# Altium PCB AD8349.PcbDoc
Units mm, origin at the board's own origin, x right, y up, seen from the top; angles counter-clockwise.
Board outline 95 x 40 mm, 2 copper layers (Top Layer, Bottom Layer); 53 components, 28 nets, 155 pads, 293 vias.
Unrouted connection lines stored in the file: 5.
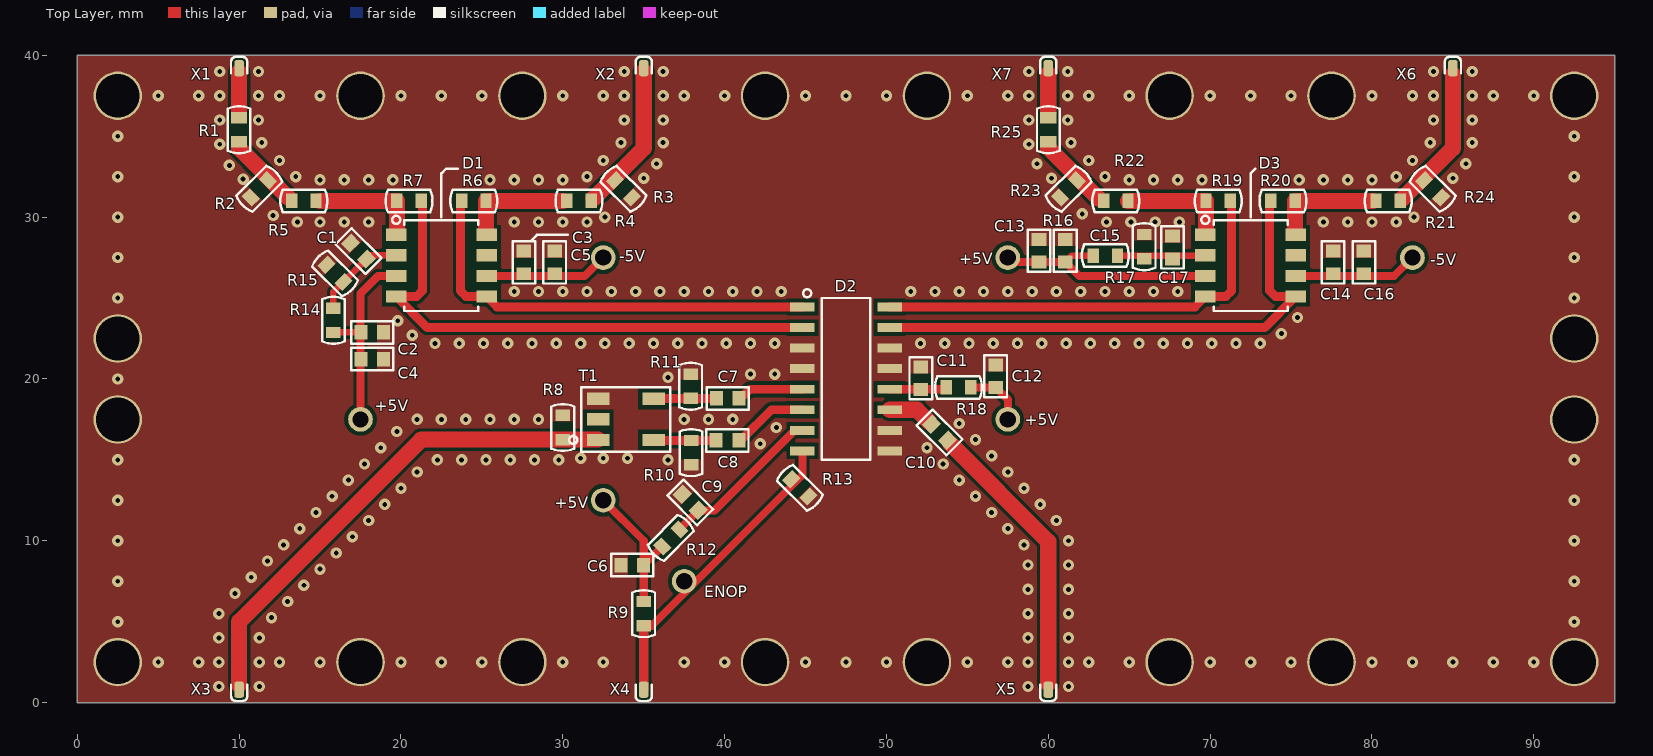
[diagram p0: Top Layer view]
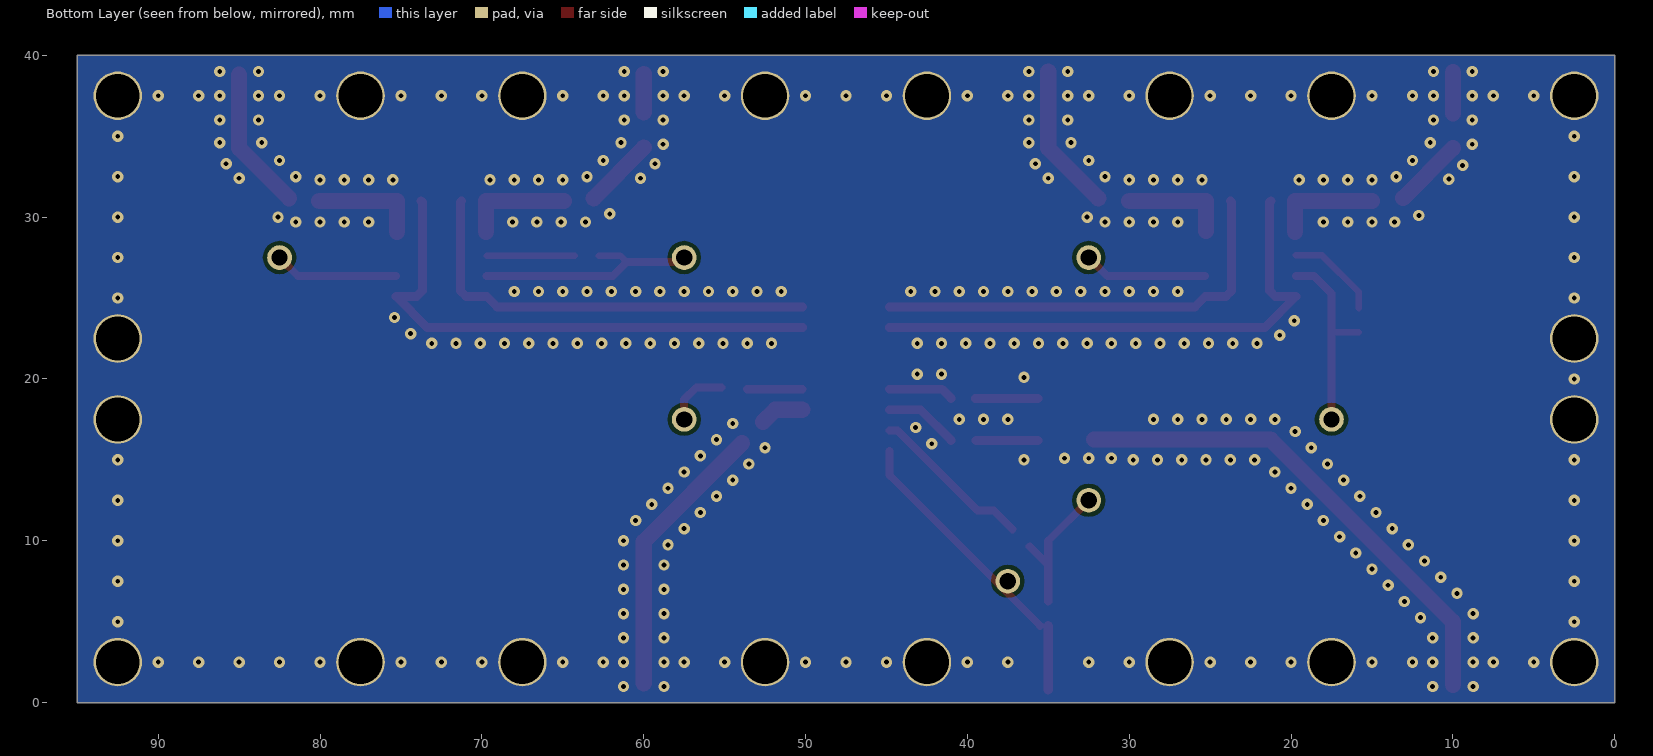
[diagram p1: Bottom Layer view, seen from below]

## Layer stack, top to bottom
Top Solder: solder mask 0.0102, Solder Resist, Dk 3.5
Top Layer: signal copper 0.0356
Dielectric 1: dielectric 0.32, FR-4, Dk 4.8
Bottom Layer: signal copper 0.0356
Bottom Solder: solder mask 0.0102, Solder Resist, Dk 3.5

## Board outline
0,0 95,0 95,40 0,40

## Design rules (kind name [scope] priority, off if disabled: settings)
Clearance [All] p1: gap=0.254 ignorepadtopadclearanceinfootprint=FALSE except(0: Arc-Hole Track-Hole SMDPad-Hole THPad-Hole Via-Hole Fill-Hole Poly-Hole Region-Hole Text-Hole; 0.2: Track-Poly)
PlaneConnect [All] p1: planeconnectstyle=Direct reliefexpansion=0.508 reliefentries=4 reliefconductorwidth=0.254 reliefairgap=0.254
PolygonConnect [All] p1: connectstyle=Direct reliefconductorwidth=0.254 reliefentries=4 polygonreliefangle="90 Angle" airgapwidth=0.254
RoutingVias [All] p1: holewidth=0.711 width=1.27 viastyle="Through Hole" minholewidth=0.711 minwidth=1.27 maxholewidth=0.711 maxwidth=1.27
SolderMaskExpansion [All] p1: expansion=0.102
Width [All] p1: maxlimit=2 minlimit=0.254 preferedwidth=0.254 bottomlayer_maxwidth=0.5 minimp=50.000000 maximp=50.000000 favimp=50.000000
29 further rules are at their usual default settings.

## Classes and differential pairs
component class AD8349: C1 C2 C3 C4 C5 C6 C7 C8 C9 C10 C11 C12 C13 C14 C15 C16 C17 D1 D2 D3 R3 R4 R5 R6 R7 R9 R10 R11 R12 R13 R14 R15 R16 R17 R19 R20 R21 R22 R23 R24 R25 T1 X2 X3 X4 X5 X6 X7

## Components (designator, comment, footprint, x,y, rotation, side; value= is the part's Value field where it differs from the comment)
C1 "0,1 мк" CAPC1608L 17.375,27.9 r315 top
C2 "0,1 мк" CAPC1608L 18.225,22.875 r180 top
C3 "0,1 мк" CAPC1608L 27.6,27.2 r270 top
C4 "10 мк" CAPC1608L 18.225,21.225 r0 top
C5 "10 мк" CAPC1608L 29.5,27.2 r270 top
C6 "0,1 мк" CAPC1608L 34.3,8.5 r0 top
C7 "100" CAPC1608L 40.2,18.8 r0 top
C8 "100" CAPC1608L 40.175,16.2 r0 top
C9 "100" CAPC1608L 37.875,12.375 r315 top
C10 "100" CAPC1608L 53.275,16.7 r315 top
C11 "100" CAPC1608L 52.125,20.05 r90 top
C12 "0,1 мк" CAPC1608L 56.75,20.175 r270 top
C13 "10 мк" CAPC1608L 59.425,27.925 r90 top
C14 "10 мк" CAPC1608L 77.6,27.2 r270 top
C15 "0,1 мк" CAPC1608L 61.05,27.925 r270 top
C16 "0,1 мк" CAPC1608L 79.5,27.2 r270 top
C17 "0,1 мк" CAPC1608L 67.675,28.125 r270 top
D1 "AD8132" SOIC127P600X196-8N 22.5,27 r0 top
D2 "AD8349" SOIC127P600X175-16N 47.5,20 r0 top
D3 "AD8132" SOIC127P600X196-8N 72.5,27 r0 top
R1 "0" RESC1608L#1 10,35.4 r90 top
R2 "24" RESC1608L#2 11.25,31.75 r45 top
R3 "49,9" RESC1608L#2 33.75,31.75 r315 top
R4 "499" RESC1608L#2 31,31 r180 top
R5 "499" RESC1608L#2 14,31 r0 top
R6 "499" RESC1608L#2 24.5,31 r180 top
R7 "499" RESC1608L#2 20.5,31 r0 top
R8 "0" RESC1608L#2 30,17 r90 top
R9 "10 к" RESC1608L#2 35,5.5 r90 top
R10 "200" RESC1608L#2 37.925,15.45 r90 top
R11 "200" RESC1608L#2 37.9,19.55 r270 top
R12 "0" RESC1608L#2 36.675,10.175 r225 top
R13 "49,9" RESC1608L#2 44.65,13.275 r315 top
R14 "10 к" RESC1608L#2 15.825,23.625 r90 top
R15 "866" RESC1608L#2 15.925,26.525 r315 top
R16 "10 к" RESC1608L#2 63.525,27.625 r0 top
R17 "866" RESC1608L#2 65.925,28.175 r270 top
R18 "0" RESC1608L#2 54.45,19.475 r0 top
R19 "499" RESC1608L#2 70.5,31 r180 top
R20 "499" RESC1608L#2 74.5,31 r0 top
R21 "499" RESC1608L#2 81,31 r0 top
R22 "499" RESC1608L#2 64.175,31 r180 top
R23 "24" RESC1608L#2 61.25,31.75 r45 top
R24 "49,9" RESC1608L#2 83.75,31.75 r315 top
R25 "0" RESC1608L#1 60,35.4 r270 top
T1 "ETC1-1-13TR" TRANS_ETC1-1-13TR 33.9,17.5 r90 top
X1 "СРГ-50-751ФВ" TP0.6X1 10,39.2 r90 top
X2 "СРГ-50-751ФВ" TP0.6X1 35,39.2 r90 top
X3 "СРГ-50-751ФВ" TP0.6X1 10,0.8 r270 top
X4 "СРГ-50-751ФВ" TP0.6X1 35,0.8 r270 top
X5 "СРГ-50-751ФВ" TP0.6X1 60,0.8 r270 top
X6 "СРГ-50-751ФВ" TP0.6X1 85,39.2 r90 top
X7 "СРГ-50-751ФВ" TP0.6X1 60,39.2 r90 top

## Footprints (in the part's own frame and the unit in brackets; to place one, negate y for a bottom-side part, rotate by r counter-clockwise, add the part's x,y. Pads: shape width x height; smd on the part's side, far side on the other; paste and mask are expansions set on the pad)
CAPC1608L [mm] "Chip Capacitor, Body 1.6x0.8mm, IPC High Density"
  rect 0.8x0.9 smd: 1(-0.7,0) 2(0.7,0)
  Top Layer pour cut-out: -0.3,0.7 -0.3,-0.7 0.3,-0.7 0.3,0.7
  silkscreen extent -1.3,-0.7 1.3,0.7, body extent -0.87,-0.47 0.87,0.47, height 0.85
RESC1608L#1 [mm] "Chip Resistor, Body 1.6x0.8mm, IPC High Density"
  rect 0.7x1 smd: 1(-0.75,0) 2(0.75,0)
  Top Layer pour cut-out: -0.4,0.7 -0.4,-0.7 0.4,-0.7 0.4,0.7
  silkscreen extent -1.45,-0.7 1.45,0.7, body extent -0.85,-0.48 0.85,0.48, height 0.6
RESC1608L#2 [mm] "Chip Resistor, Body 1.6x0.8mm, IPC High Density"
  rect 0.7x0.9 smd: 1(-0.75,0) 2(0.75,0)
  Top Layer pour cut-out: -0.4,0.7 -0.4,-0.7 0.4,-0.7 0.4,0.7
  silkscreen extent -1.45,-0.7 1.45,0.7, body extent -0.85,-0.47 0.85,0.47, height 0.6
SOIC127P600X175-16N [mm] "SOIC, 16-Leads, Body 10,0x4,0mm (max), Pitch 1,27mm, IPC Medium Density"
  rect 1.5x0.55 smd: 1(-2.7,4.445) 2(-2.7,3.175) 3(-2.7,1.905) 4(-2.7,0.635) 5(-2.7,-0.635) 6(-2.7,-1.905) 7(-2.7,-3.175) 8(-2.7,-4.445) 9(2.7,-4.445) 10(2.7,-3.175) 11(2.7,-1.905) 12(2.7,-0.635) 13(2.7,0.635) 14(2.7,1.905) 15(2.7,3.175) 16(2.7,4.445)
  silkscreen extent -2.65,-5 1.5,5.54, body extent -3,-4.95 3,4.95, height 1.54
SOIC127P600X196-8N [mm] "SOIC, 8-Leads, Body 5,33x4,14mm, Pitch 1,27mm, IPC Medium Density"
  rect 1.27x0.76 smd: 1(-2.795,1.905) 2(-2.795,0.635) 3(-2.795,-0.635) 4(-2.795,-1.905) 5(2.795,-1.905) 6(2.795,-0.635) 7(2.795,0.635) 8(2.795,1.905)
  silkscreen extent -3.04,-2.8 2.29,3.08, body extent -3,-2.54 3,2.54, height 1.7
TP0.6X1 [mm] "Точка пайки переход СРГ-50-751 (плата заштифтована)"
  rrect50% 1x0.6 smd paste-25.4: 1(0,0)
  silkscreen extent -0.3,-0.5 0.7,0.5
TRANS_ETC1-1-13TR [mil] "Surface Mount transformer, 3.8x3.8x2.8"
  rect 30x55 smd: 1(-50,67.5) 2(0,67.5) 4(50,-67.5) 5(-50,-67.5)
  rect 30x55 smd mask+4: 3(50,67.5)
  silkscreen extent -79,-108 79,138, body extent -75,-95 75,95, height 112

## Part data
C1 C2 C3 C6 C12 C15 C16 C17: library part i6124B5A08701E000001, "Чип-конденсатор", ManufacturerPartNumber="0603 X7R 0,1 мкФ ±10 % 50 В", Power/Voltage="50 В", Tolerance="±10 %", ImKey=i6124B5A08701E000001, Name=0603, PCADLibrary=PASSIV.LIB, PCADPattern=C0603, PCADSymbol=C, PCADType=C0603, TKE/TKC={TKE/TKC}, Type=Конденсатор
C4 C5 C13 C14: library part i6124B5A08768E000003, "Чип-конденсатор", ManufacturerPartNumber="GRM188R61E106MA73* Murata", Power/Voltage="25 В", Tolerance="±20 %", ImKey=i6124B5A08768E000003, Name=0603, PCADLibrary=PASSIV.LIB, PCADPattern=C0603, PCADSymbol=C, PCADType=C0603, TKE/TKC=X5R, Type=Конденсатор
C7 C8 C9 C10 C11: library part i6124B5A08767E000062, "Чип-конденсатор", ManufacturerPartNumber="GCM1885C2A101JA16* Murata", Power/Voltage="100 В", Tolerance="±5 %", ImKey=i6124B5A08767E000062, Name=0603, PCADLibrary=PASSIV.LIB, PCADPattern=C0603, PCADSymbol=C, PCADType=C0603, TKE/TKC=C0G, Type=Конденсатор
D1 D3: Manufacturer="Analog Devices", Package=SO-8, ManufacturerPartNumber=AD8132, Type=Микросхема
D2: "WIDEBAND DIRECT QUADRATURE MODULATOR, 100 - 6000 MHz", Manufacturer=Hittite, Package=LP4E, ManufacturerPartNumber=AD8349, SymAuthor="Чернова Ю.Г.", Type=Микросхема
R1 R8 R12 R25: library part i6124B5A0876CD00004D, "Чип-резистор", ManufacturerPartNumber="CR0603-J/-000ELF Bourns", Tolerance={Tolerance}, ImKey=i6124B5A0876CD00004D, Name=0603, PCADLibrary=PASSIV.LIB, PCADPattern=R0603, PCADSymbol=R, PCADType=R0603, Type=Резистор
R2 R23: library part i6124B5A0876CD000079, "Чип-резистор", ManufacturerPartNumber="CR0603-JW-240ELF Bourns", Tolerance="±5 %", ImKey=i6124B5A0876CD000079, Name=0603, PCADLibrary=PASSIV.LIB, PCADPattern=R0603, PCADSymbol=R, PCADType=R0603, Type=Резистор
R3 R13 R24: library part i6124B5A08741A00000E, "Чип-резистор", ManufacturerPartNumber="Р1-12-0,1-49,9 Ом ±1 % - Т", Power/Voltage="0,1 Вт", Tolerance="±1 %", ImKey=i6124B5A08741A00000E, Name=0603, TU/GOST="АЛЯР.434110.005 ТУ", Type=Резистор
R4 R5 R6 R7 R19 R20 R21 R22: library part i6124B5A08741A00002A, "Чип-резистор", ManufacturerPartNumber="Р1-12-0,1-499 Ом ±1 % - Т", Power/Voltage="0,1 Вт", Tolerance="±1 %", ImKey=i6124B5A08741A00002A, Name=0603, TU/GOST="АЛЯР.434110.005 ТУ", Type=Резистор
R9 R14 R16: library part i6124B5A0876CD000030, "Чип-резистор", ManufacturerPartNumber="CR0603-JW-103ELF Bourns", Tolerance="±5 %", ImKey=i6124B5A0876CD000030, Name=0603, PCADLibrary=PASSIV.LIB, PCADPattern=R0603, PCADSymbol=R, PCADType=R0603, Type=Резистор
R10 R11: library part i6124B5A0876CD000039, "Чип-резистор", ManufacturerPartNumber="CR0603-JW-201ELF Bourns", Tolerance="±5 %", ImKey=i6124B5A0876CD000039, Name=0603, PCADLibrary=PASSIV.LIB, PCADPattern=R0603, PCADSymbol=R, PCADType=R0603, Type=Резистор
R15 R17: library part R0603, "Чип-резистор", ManufacturerPartNumber="CR0603-FX-8660ELF Bourns", Tolerance="±1 %", Name=0603, Type=Резистор
R18: library part i6124B5A08711900002C, "Чип-резистор", ManufacturerPartNumber="0603 0 Ом", Power/Voltage="0,063 Вт", Tolerance={Tolerance}, ImKey=i6124B5A08711900002C, Name=0603, Type=Резистор
T1: "Трансформатор", Manufacturer*=Mini-Circuits, Package=SM-22, Power/Voltage*=0.25Вт, ManufacturerPartNumber=ETC1-1-13TR, Type=Трансформатор
X1 X2 X3 X4 X5 X6 X7: "Переход", ManufacturerPartNumber=СРГ-50-751ФВ, TU/GOST="ВР0.364.049 ТУ", Type=Переход

## Free pads (board coordinates)
  round 3 hole 2.7: 1(2.5,2.5) 1(2.5,17.5) 1(2.5,22.5) 1(2.5,37.5) 1(17.5,2.5) 1(17.5,37.5) 1(27.5,2.5) 1(27.5,37.5) 1(42.5,2.5) 1(42.5,37.5) 1(52.5,2.5) 1(52.5,37.5) 1(67.5,2.5) 1(67.5,37.5) 1(77.5,2.5) 1(77.5,37.5) 1(92.5,2.5) 1(92.5,17.5) 1(92.5,22.5) 1(92.5,37.5)
  round 1.524 hole 1: 2(17.5,17.5) 2(32.5,12.5) 2(32.5,27.5) 2(37.5,7.5) 2(57.5,17.5) 2(57.5,27.5) 2(82.5,27.5)

## Via types
v1: diameter 0.7, hole 0.3, Top Layer to Bottom Layer, 293 vias

## Nets (pads, with @x,y where several pads share a name; then routed paths per layer and width w, separated by ;. In a path a pad name is that pad's centre, name@x,y a point inside that pad or via, vN(x,y) a via of type N, cw(c..) or ccw(c..) an arc to the next point about the centre after c; other vN are vias at no path point)
+5V: C2.2 C4.1 C6.2 C12.2 C13.1 C15.2 D1.3 D3.3 pad.2@17.5,17.5 pad.2@32.5,12.5 pad.2@57.5,17.5 pad.2@57.5,27.5 R9.2 R12.2 R14.1 R16.1 R18.2 | length 39.4
  Top Layer w0.3: C2.2@17.5,22.875 C2.2 ; pad.2@57.5,27.5 pad.2@57.775,27.225
  Top Layer w0.4: R14.1 C2.2@17.5,22.875 ; C15.2 61.45,27.625 R16.1
  Top Layer w0.5: pad.2@17.5,17.5 17.5,22.875 17.5,25.275 18.59,26.365 D1.3 ; pad.2@32.5,12.5 35,10 C6.2 ; R9.2 C6.2 ; R12.2 C6.2 ; R18.2 C12.2 57.5,18.725 pad.2@57.5,17.5 ; pad.2@57.775,27.225 C13.1 C15.2 61.91,26.365 D3.3
-5V: C3.2 C5.2 C14.2 C16.2 D1.6 D3.6 pad.2@32.5,27.5 pad.2@82.5,27.5 | length 15.3
  Top Layer w0.5: D1.6@25.31,26.35 27.6,26.35 29.475,26.35 31.35,26.35 pad.2@32.5,27.5 ; D3.6@75.31,26.35 77.525,26.35 79.525,26.35 81.35,26.35 pad.2@82.5,27.5
GND: C1.1 C2.1 C3.1 C4.2 C5.1 C6.1 C9.1 C11.2 C12.1 C13.2 C14.1 C15.1 C16.1 C17.1 D2.3 D2.4 D2.9 D2.10 D2.13 D2.14 pad.1 R2.1 R3.2 R8.2 R10.1 R11.1 R13.2 R15.1 R17.1 R23.1 R24.2 T1.3
  other v1: 8.75,1 11.25,1 58.75,1 61.25,1 5,2.5 7.5,2.5 8.75,2.5 11.25,2.5 12.5,2.5 15,2.5 20,2.5 22.5,2.5 25,2.5 30,2.5 32.5,2.5 37.5,2.5 40,2.5 45,2.5 47.5,2.5 50,2.5 55,2.5 57.5,2.5 58.75,2.5 61.25,2.5 62.5,2.5 65,2.5 70,2.5 72.5,2.5 75,2.5 80,2.5 82.5,2.5 85,2.5 87.5,2.5 90,2.5 8.75,4 11.25,4 58.75,4 61.25,4 2.5,5 92.5,5 12,5.25 8.75,5.5 58.75,5.5 61.25,5.5 13,6.25 9.75,6.75 58.75,7 61.25,7 14,7.25 2.5,7.5 92.5,7.5 10.75,7.75 15,8.25 58.75,8.5 61.25,8.5 11.75,8.75 16,9.25 12.75,9.75 58.5,9.75 2.5,10 61.25,10 92.5,10 17,10.25 13.75,10.75 57.5,10.75 18,11.25 60.5,11.25 14.75,11.75 56.5,11.75 19,12.25 59.5,12.25 2.5,12.5 92.5,12.5 15.75,12.75 55.5,12.75 20,13.25 58.5,13.25 16.75,13.75 54.5,13.75 21,14.25 57.5,14.25 17.75,14.75 53.5,14.75 2.5,15 22.25,15 23.75,15 25.25,15 26.75,15 28.25,15 29.75,15 36.5,15 92.5,15 31.1,15.1 32.5,15.1 34,15.1 56.5,15.25 18.75,15.75 52.5,15.75 42.2,16 55.5,16.25 19.75,16.75 43.2,17 54.5,17.25 21,17.5 22.5,17.5 24,17.5 25.5,17.5 27,17.5 28.5,17.5 37.5,17.5 39,17.5 40.5,17.5 2.5,20 36.5,20.1 41.6,20.3 43.1,20.3 22.1,22.2 23.6,22.2 25.1,22.2 26.6,22.2 28.1,22.2 29.6,22.2 31.1,22.2 32.6,22.2 34.1,22.2 35.6,22.2 37.1,22.2 38.6,22.2 40.1,22.2 41.6,22.2 43.1,22.2 52.1,22.2 53.6,22.2 55.1,22.2 56.6,22.2 58.1,22.2 59.6,22.2 61.1,22.2 62.6,22.2 64.1,22.2 65.6,22.2 67.1,22.2 68.6,22.2 70.1,22.2 71.6,22.2 73.1,22.2 20.7,22.7 74.4,22.8 19.8,23.6 75.4,23.8 2.5,25 92.5,25 27,25.4 28.5,25.4 30,25.4 31.5,25.4 33,25.4 34.5,25.4 36,25.4 37.5,25.4 39,25.4 40.5,25.4 42,25.4 43.5,25.4 51.5,25.4 53,25.4 54.5,25.4 56,25.4 57.5,25.4 59,25.4 60.5,25.4 62,25.4 63.5,25.4 65,25.4 66.5,25.4 68,25.4 2.5,27.5 92.5,27.5 13.6,29.7 15,29.7 16.5,29.7 18,29.7 27,29.7 28.5,29.7 30,29.7 31.5,29.7 63.6,29.7 65.1,29.7 66.6,29.7 68.1,29.7 77,29.7 78.5,29.7 80,29.7 81.5,29.7 2.5,30 32.6,30 82.6,30 92.5,30 12.1,30.1 62.1,30.2 15,32.3 16.5,32.3 18,32.3 19.5,32.3 25.5,32.3 27,32.3 28.5,32.3 30,32.3 65,32.3 66.5,32.3 68,32.3 69.5,32.3 75.5,32.3 77,32.3 78.5,32.3 80,32.3 10.25,32.35 35,32.4 60.2,32.4 85,32.4 2.5,32.5 13.5,32.5 31.5,32.5 63.5,32.5 81.5,32.5 92.5,32.5 9.4,33.2 35.8,33.3 59.3,33.3 85.8,33.3 12.5,33.5 32.5,33.5 62.5,33.5 82.5,33.5 8.8,34.5 58.8,34.5 11.4,34.6 33.6,34.6 36.2,34.6 61.4,34.6 83.6,34.6 86.2,34.6 2.5,35 92.5,35 8.8,36 11.2,36 33.8,36 36.2,36 58.8,36 61.2,36 83.8,36 86.2,36 5,37.5 7.5,37.5 8.8,37.5 11.2,37.5 12.5,37.5 15,37.5 20,37.5 22.5,37.5 25,37.5 30,37.5 32.5,37.5 33.8,37.5 36.2,37.5 37.5,37.5 40,37.5 45,37.5 47.5,37.5 50,37.5 55,37.5 57.5,37.5 58.8,37.5 61.2,37.5 62.5,37.5 65,37.5 70,37.5 72.5,37.5 75,37.5 80,37.5 82.5,37.5 83.8,37.5 86.2,37.5 87.5,37.5 90,37.5 8.8,39 11.2,39 33.8,39 36.2,39 58.8,39 61.2,39 83.8,39 86.2,39
NetC7_1: C7.1 R11.2 T1.4 | length 3.9
  Top Layer w0.55: T1.4@35.645,18.8 C7.1
NetC7_2: C7.2 D2.5 | length 4
  Top Layer w0.55: C7.2@41,18.8 41.565,19.365 D2.5
NetC8_1: C8.1 R10.2 T1.5 | length 3.8
  Top Layer w0.55: T1.5@35.644,16.2 C8.1
NetC8_2: C8.2 D2.6 | length 4.6
  Top Layer w0.55: C8.2@41,16.2 42.895,18.095 D2.6
NetC9_2: C9.2 D2.7 R12.1 | length 10.1
  Top Layer w0.5: R12.1@37.205,10.715 C9.2 ; C9.2@38.375,11.875 39.375,11.875 44.325,16.825 D2.7
NetC10_1: C10.1 D2.11 | length 2.8
  Top Layer w1: D2.11 51.88,18.095 C10.1@52.637,17.338
NetC10_2: C10.2 X5.1 | length 17.3
  Top Layer w1: C10.2@53.925,16.025 60,9.95 X5.1@60,1.2
NetC11_1: C11.1 D2.12 R18.1 | length 3.4
  Top Layer w0.5: D2.12 R18.1@53.615,19.365
NetD1_1: D1.1 R5.2 R7.1 | length 6.7
  Top Layer w1: R5.2@15,31 R7.1 D1.1@19.75,29.1
NetD1_4: D1.4 D2.2 R7.2 | length 33.2
  Top Layer w0.55: R7.2 21.325,30.925 21.325,25.45 20.97,25.095 D1.4 21.625,23.175 D2.2
NetD1_5: D1.5 D2.1 R6.2 | length 27.1
  Top Layer w0.55: R6.2 23.675,30.925 23.675,25.45 24.03,25.095 D1.5 25.945,24.445 D2.1
NetD1_8: D1.8 R4.2 R6.1 | length 6.6
  Top Layer w1: D1.8@25.25,29.15 R6.1 R4.2@30,31
NetD2_8: D2.8 pad.2@37.5,7.5 R9.1 R13.1 X4.1 | length 19.1
  Top Layer w0.3: R9.1 35.5,4.75
  Top Layer w0.5: 35.5,4.75 44.8,14.05 D2.8
  Top Layer w0.6: X4.1 R9.1
NetD2_15: D2.15 D3.5 R20.1 | length 33.2
  Top Layer w0.55: D2.15 73.375,23.175 75.3,25.1 74.025,25.1 73.675,25.45 73.675,30.925 R20.1
NetD2_16: D2.16 D3.4 R19.1 | length 27.1
  Top Layer w0.55: D2.16 69.055,24.445 D3.4 70.97,25.095 71.325,25.45 71.325,30.925 R19.1
NetD3_1: D3.1 R19.2 R22.1 | length 6.7
  Top Layer w1: R22.1 R19.2 D3.1@69.75,29.1
NetD3_8: D3.8 R20.2 R21.1 | length 6.7
  Top Layer w1: D3.8@75.25,29.1 R20.2 R21.1@80.05,31
NetR1_1: R1.1 R2.2 R5.1 | length 4.3
  Top Layer w1: 10,34.25 R5.1@13.075,31.175
NetR1_2: R1.2 X1.1 | length 2.5
  Top Layer w1: R1.2@10,36.4 X1.1@10,38.95
NetR3_1: R3.1 R4.1 X2.1 | length 9.1
  Top Layer w1: R4.1@31.913,31.163 35,34.25 X2.1@35,39
NetR8_1: R8.1 T1.1 X3.1 | length 30.7
  Top Layer w1: X3.1@10,1.1 10,5 21.25,16.25 T1.1@32.186,16.25
NetR21_2: R21.2 R24.1 X6.1 | length 8.9
  Top Layer w1: R21.2@81.913,31.163 85,34.25 X6.1@85,38.8
NetR22_2: R22.2 R23.2 R25.2 | length 4.4
  Top Layer w1: R25.2@60,34.3 R22.2@63.087,31.162
NetR25_1: R25.1 X7.1 | length 2.4
  Top Layer w1: R25.1@60,36.475 X7.1@60,38.85
VOCM: C1.2 C17.2 D1.2 D3.2 R14.2 R15.2 R16.2 R17.2 | length 11.2
  Top Layer w0.4: R14.2 15.825,25.375 18.085,27.635 D1.2 ; R16.2 D3.2@69.695,27.625
pads on no net: D1.7 D3.7 T1.2

## Polygon pours and split planes (outlines as drawn)
no net on Bottom Solder "NONET_L-01_P-001" (solid): 0,40 0,0 95,0 95,40
GND on Bottom Layer "NONET_L-01_P-001" (solid, pour order 4): 0,0 0,40 95,40 95,0
GND on Top Layer "NONET_L-01_P-001" (solid, pour order 6): 0,0 0,40 95,40 95,0

## Silkscreen, mask and mechanical layers (free items; w line width, h text height)
Top Overlay:
  lines w0.15: 22.5,30 22.5,32.7 22.8,33 23.5,33 ; 28,28.5 28.4,28.9 ; 30.3,28.9 28.4,28.9 ; 72.5,30 72.5,32.7 72.8,33 ; 28.4,28.9 28.4,28.9
  text "-5V" at 33.49,27.235 h0.7
  text "+5V" at 54.5,27.075 h0.7
  text "-5V" at 83.6,27.025 h0.7
  text "+5V" at 18.387,18.012 h0.7
  text "+5V" at 58.55,17.15 h0.7
  text "+5V" at 29.5,12.025 h0.7
  text "ENOP" at 38.75,6.5 h0.7
Top Solder:
  lines w0.59: 20,24.8 21.625,23.175 21.65,23.175 44.575,23.175 ; 25.45,24.925 25.925,24.45 25.95,24.45 ; 50.425,23.175 73.35,23.175 ; 69.075,24.45 69.55,24.925 ; 73.375,23.175 75,24.8
  lines w0.6: 25.95,24.45 44.7,24.45 ; 50.3,24.45 69.05,24.45
  lines w0.8: 35,1.2 35,4.3
  lines w1.1: 13.05,31.2 13.1,31.2 ; 19.75,28.988 19.75,31.013 ; 25.25,28.988 25.25,31.013 ; 69.75,28.988 69.75,31.013 ; 75.25,28.988 75.25,31.013
  lines w1.4: 10,1.3 10,5 21.25,16.25 32,16.25 ; 10,38.9 10,34.25 13.05,31.2 ; 15,31 19.475,31 ; 25.525,31 30,31 ; 31.95,31.2 35,34.25 35,38.9 ; 54.125,15.825 60,9.95 60,1.3 ; 60,38.9 60,34.275 63.05,31.225 ; 65,31 69.475,31 ; 75.275,31 80,31 ; 81.95,31.2 85,34.25 85,38.7
Mechanical 4:
  lines w0.254: 0.1,0.1 94.9,0.1 94.9,39.9 0.1,39.9 0.1,0.1
Mechanical 5:
  drawing of 153 lines, arcs and shapes, not listed